# Altium PCB ESP32_Watch_Project_V2.0.PcbDoc
Units mil, origin at the board's own origin, x right, y up, seen from the top; angles counter-clockwise.
Board outline 1379.8 x 1574.8 mil, 2 copper layers (Top Layer, Bottom Layer); 52 components, 40 nets, 209 pads, 1 vias.
Unrouted connection lines stored in the file: 81.
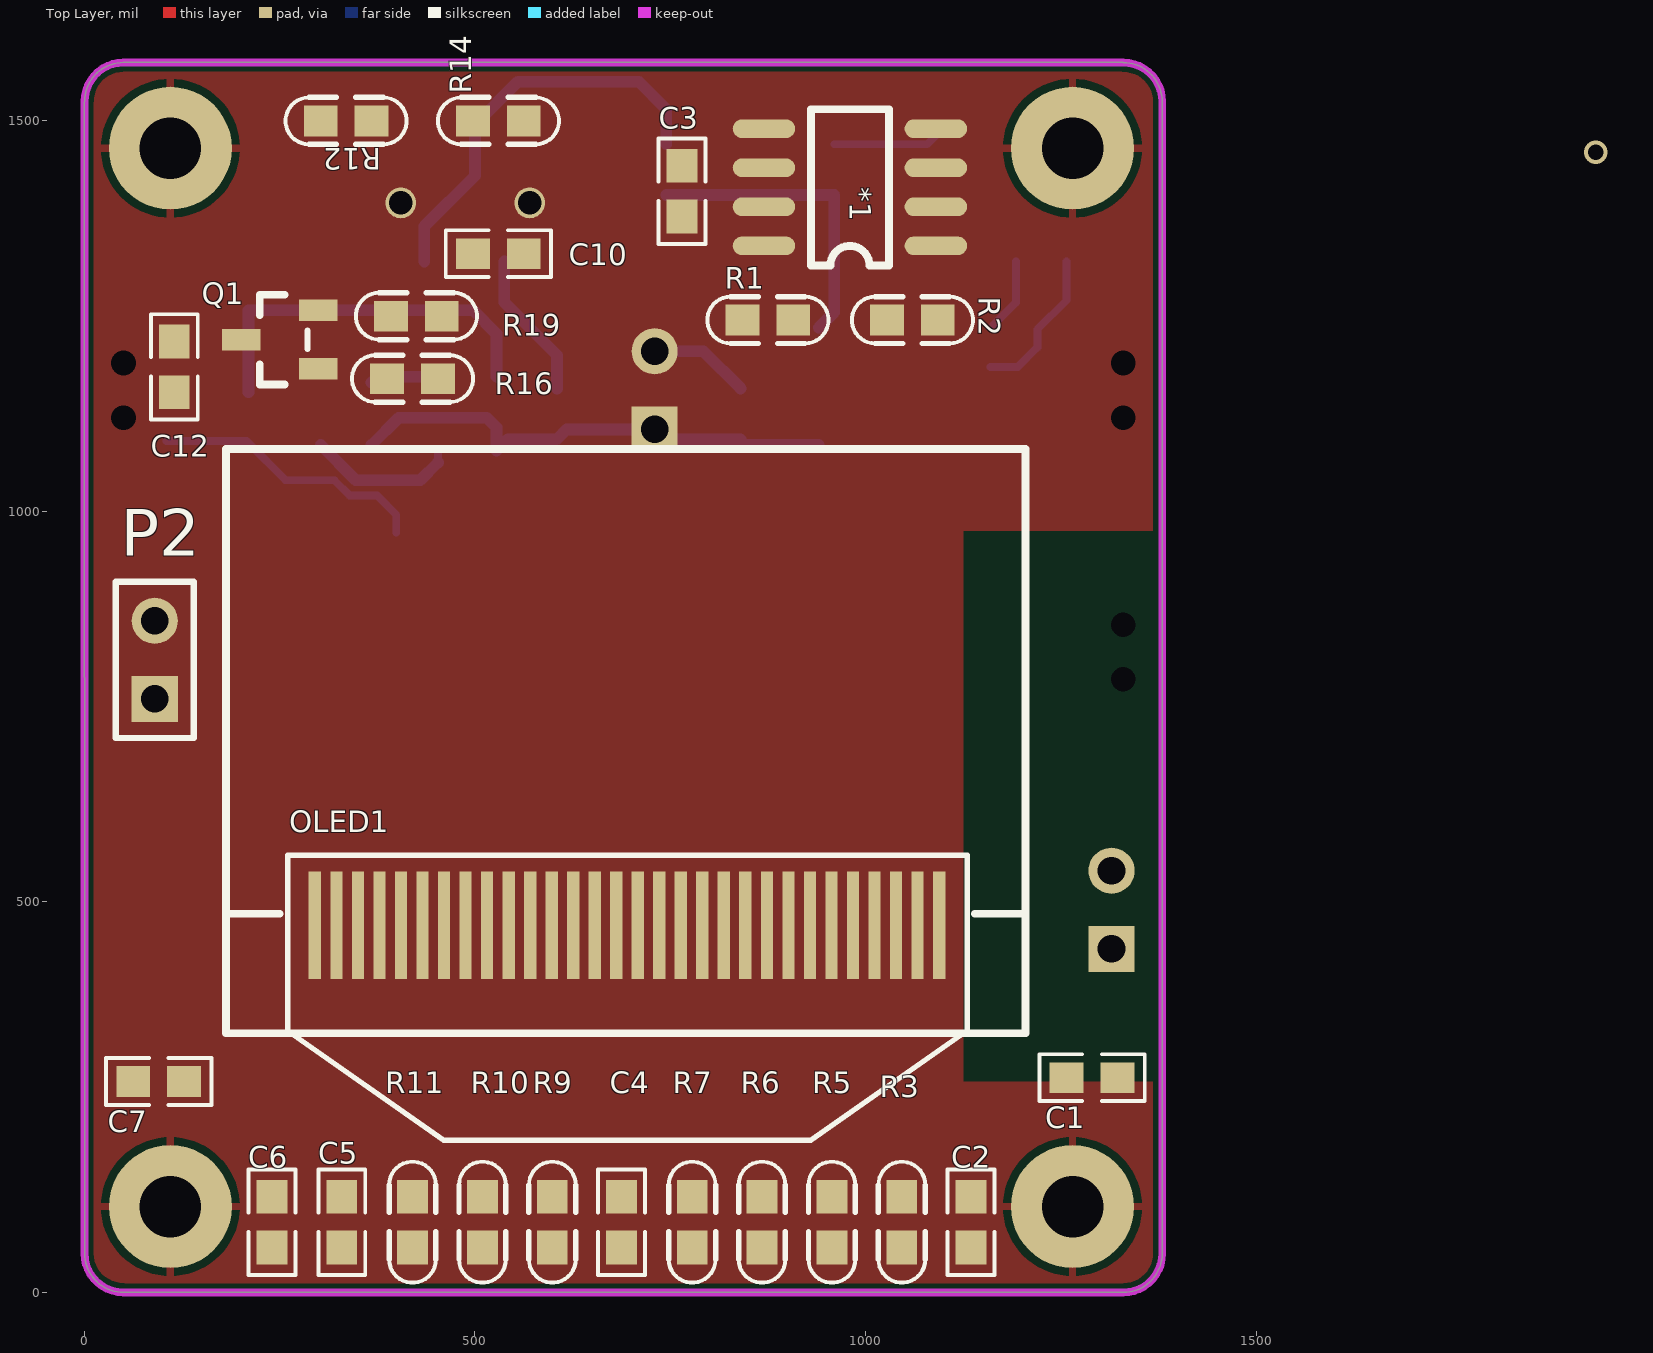
[diagram p0: Top Layer view]
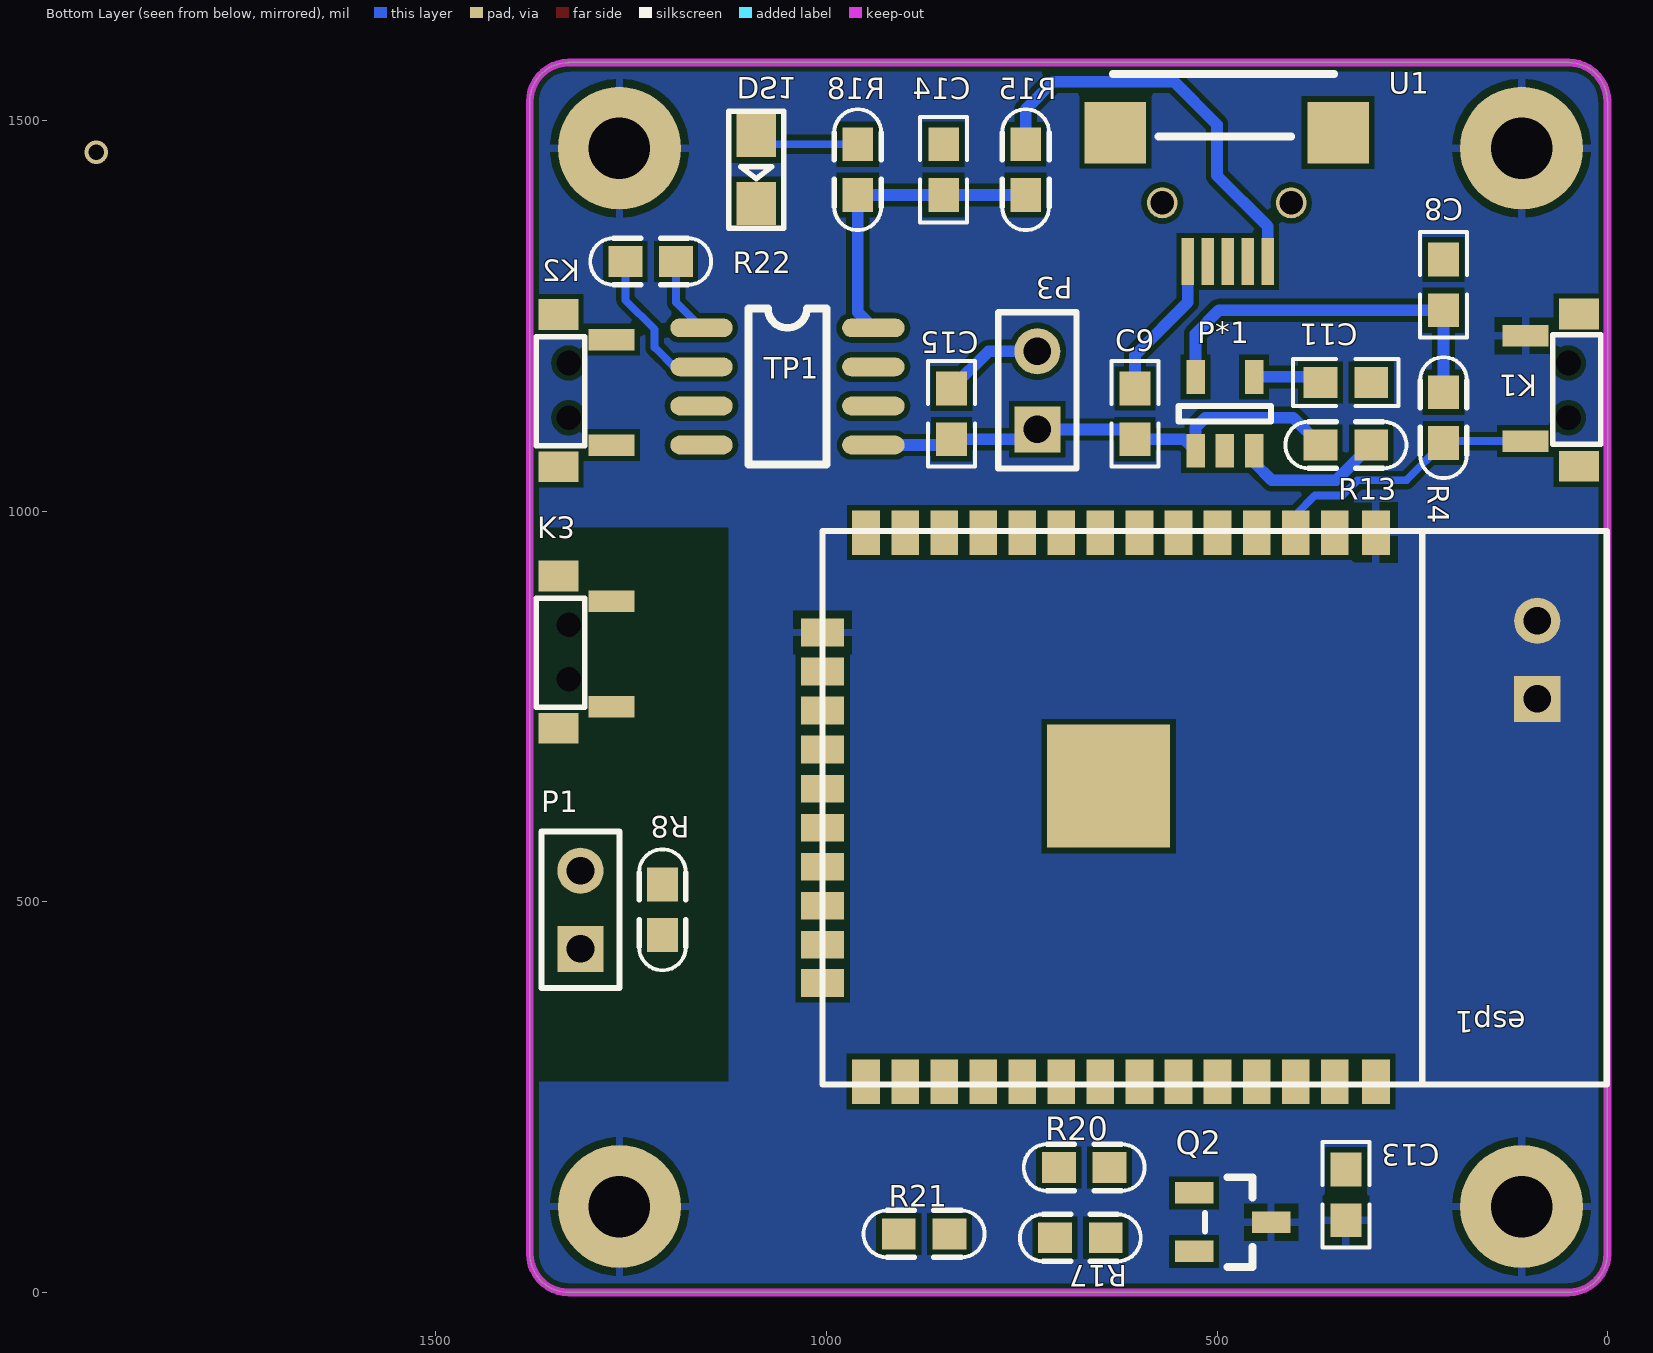
[diagram p1: Bottom Layer view, seen from below]

## Layer stack, top to bottom
Top Solder: solder mask 0.4, Solder Resist, Dk 3.5
Top Layer: signal copper 1.4
Dielectric 1: dielectric 12.6, FR-4, Dk 4.8
Bottom Layer: signal copper 1.4
Bottom Solder: solder mask 0.4, Solder Resist, Dk 3.5

## Board outline
0.2,50 ccw(c50,50) 50,0.2 50,0 1330,0 ccw(c1330,49.8) 1379.8,49.8 1379.8,1524.8 ccw(c1330,1524.8) 1330,1574.61 1330,1574.8 50,1574.8 ccw(c50,1525) 0.2,1525 0,1524.8

## Design rules (kind name [scope] priority, off if disabled: settings)
Clearance [All] p1: gap=7
PolygonConnect [All] p1: connectstyle=Relief reliefconductorwidth=10 reliefentries=4 polygonreliefangle="90 Angle" airgapwidth=10
RoutingVias [All] p1: holewidth=28 width=50 viastyle="Through Hole" minholewidth=28 minwidth=50 maxholewidth=28 maxwidth=50
ShortCircuit [All] p1: allowed=TRUE
SolderMaskExpansion [All] p1: expansion=4
Width [All] p1: maxlimit=20 minlimit=10 preferedwidth=10
29 further rules are at their usual default settings.

## Classes and differential pairs
component class ESP32_Watch_Project_V2.0: *1 C1 C2 C3 C4 C5 C6 C7 C8 C9 C10 C11 C12 C13 DS1 esp1 K1 K3 OLED1 P1 P3 P*1 Q1 Q2 R1 R2 R3 R4 R5 R6 R7 R8 R9 R10 R11 R12 R13 R14 R15 R16 R17 R18 R19 R20 R21 R22 TP1 U1

## Components (designator, comment, footprint, x,y, rotation, side; value= is the part's Value field where it differs from the comment)
*1 "DS3231" 2104 1090,1340 r270 top
C1 "2.2uF" R0603#1 1290,275 r90 top
C2 "4.7uF" R0603#1 1135,90 r0 top
C3 "104" R0603#1 765,1410 r0 top
C4 "4.7uF" R0603#1 687.5,90 r0 top
C5 "1uF" R0603#1 329.5,90 r0 top
C6 "1uF" R0603#1 240,90 r180 top
C7 "1uF" R0603#1 95,270 r270 top
C8 "2.2uF" R0603#1 210,1290 r180 bottom
C9 "1uF" R0603#1 605,1125 r180 bottom
C10 "0.1uF" R0603#1 530,1330 r270 top
C11 "10nF" R0603#1 335,1165 r270 bottom
C12 "4.7uf" R0603#1 115,1185 r180 top
C13 "4.7uf" R0603#1 335,125 r180 bottom
C14 "10uF" R0603#2 850,1437.5 r180 bottom
C15 "10uF" R0603#1 840,1125 r180 bottom
DS1 "LED" SMDLED 1090,1481.06 r270 bottom
esp1 "3.3v" esp32_cord 1005,975 r270 bottom
K1 "KEY_B" KEY_b 5,1230 r270 bottom locked
K2 "KEY_B" KEY_b 1375,1080 r90 bottom locked
K3 "KEY_B" KEY_b 1375,745 r90 bottom
OLED1 "OLED 0.96" 0.96_OLED 690,525 r0 top
P1 "Header 2" HDR1X2 1315,440 r90 bottom
P2 "Header 2" HDR1X2 90,760 r90 top
P3 "Header 2" HDR1X2 730,1105 r90 bottom
P*1 "CAT6219" CAT6219 405,1160 r90 bottom
Q1 "SI2302" SOT-23(SOT-23-3) 250,1220 r0 top
Q2 "SI2302" SOT-23(SOT-23-3) 480,90 r0 bottom
R1 "4.3K" C0603#1 875,1245 r90 top
R2 "4.3K" C0603#1 1060,1245 r270 top
R3 "910K" C0603#1 1046.5,90 r0 top
R4 "12k" C0603#1 210,1120 r0 bottom
R5 "4.7K" C0603#1 957,90 r0 top
R6 "4.7K" C0603#1 867.5,90 r0 top
R7 "4.7K" C0603#1 778,90 r0 top
R8 "12k" C0603#1 1210,490 r0 bottom
R9 "10K" C0603#1 599,90 r0 top
R10 "1K" C0603#1 509.5,90 r180 top
R11 "1K" C0603#1 420,90 r180 top
R12 "330K" C0603#1 335,1500 r270 top
R13 "10k" C0603#1 335,1085 r270 bottom
R14 "100K" C0603#1 530,1500 r270 top
R15 "0.4R" C0603#2 745,1437.5 r0 bottom
R16 "100R" C0603#1 420,1170 r270 top
R17 "100R" C0603#1 675,70 r90 bottom
R18 "1.2k" C0603#2 960,1437.5 r180 bottom
R19 "10k" C0603#1 425,1250 r270 top
R20 "10k" C0603#1 670,160 r90 bottom
R21 "12k" C0603#1 875,75 r270 bottom
R22 "1.2k" C0603#1 1225,1320 r90 bottom
TP1 "TP4056" 2104 1160,1235 r90 bottom
U1 "U?" type_a 630,1355 r180 bottom

## Footprints (in the part's own frame and the unit in brackets; to place one, negate y for a bottom-side part, rotate by r counter-clockwise, add the part's x,y. Pads: shape width x height; smd on the part's side, far side on the other; paste and mask are expansions set on the pad)
0.96_OLED [mm]
  rect 0.4x3.5 smd: 1(-10.033,-1.397) 2(-9.333,-1.397) 3(-8.633,-1.397) 4(-7.933,-1.397) 5(-7.233,-1.397) 6(-6.533,-1.397) 7(-5.833,-1.397) 8(-5.133,-1.397) 9(-4.433,-1.397) 10(-3.733,-1.397) 11(-3.033,-1.397) 12(-2.333,-1.397) 13(-1.633,-1.397) 14(-0.933,-1.397) 15(-0.233,-1.397) 16(0.467,-1.397) 17(1.167,-1.397) 18(1.867,-1.397) 19(2.567,-1.397) 20(3.267,-1.397) 21(3.967,-1.397) 22(4.667,-1.397) 23(5.367,-1.397) 24(6.067,-1.397) 25(6.767,-1.397) 26(7.467,-1.397) 27(8.167,-1.397) 28(8.867,-1.397) 29(9.567,-1.397) 30(10.267,-1.397)
  silkscreen extent -10.92,-8.38 11.18,0.89
2104 [mil]
  oval 24x80 smd: 1(0,0) 2(-50,0) 3(-100,0) 4(-150,0) 5(-150,-220) 6(-100,-220) 7(-50,-220) 8(0,-220)
  silkscreen extent -175,-160 25,-60
C0603#1 [mm]
  rect 1x1.1 smd: 1(0,0.826) 2(0,-0.826)
  silkscreen extent -0.76,-1.97 0.76,1.97
C0603#2 [mm]
  rect 1x1.1 smd: 1(0,-0.826) 2(0,0.826)
  silkscreen extent -0.76,-1.97 0.76,1.97
CAT6219 [mm]
  rect 1.1x0.6 smd: 1(-2.089,3.109) 2(-2.089,2.159) 3(-2.089,1.209) 4(0.311,1.209) 5(0.311,3.109)
  silkscreen extent -1.14,0.66 -0.64,3.66
esp32_cord [mil]
  rect 57x35.43 smd: 1(2,708.66) 2(2,655.72) 3(2,605.72) 4(2,555.72) 5(2,505.72) 6(2,455.72) 7(2,405.72) 8(2,355.72) 9(2,305.72) 10(2,255.72) 11(2,205.72) 12(2,155.72) 13(2,105.72) 14(2,55.72) 25(705,55.72) 26(705,105.72) 27(705,155.72) 28(705,205.72) 29(705,255.72) 30(705,305.72) 31(705,355.72) 32(705,405.72) 33(705,455.72) 34(705,505.72) 35(705,555.72) 36(705,605.72) 37(705,655.72) 38(705,708.66)
  rect 35.43x55 smd: 15(129.92,0) 16(179.92,0) 17(229.92,0) 18(279.92,0) 19(329.92,0) 20(379.92,0) 21(429.92,0) 22(479.92,0) 23(529.92,0) 24(578.74,0)
  rect 157.48x157.48 smd: 39(326.77,366.14)
  silkscreen extent 0,0 709,1004
HDR1X2 [mm] "Connector; Header; 2 Position"
  rect 1.5x1.5 hole 0.9: 1(0,0)
  round 1.5 hole 0.9: 2(2.54,0)
  silkscreen extent -1.27,-1.27 3.81,1.27
KEY_b [mm]
  rect 0.7x1.5 smd: 1(0.127,-2.54) 2(3.556,-2.54)
  round 0 hole 0.8: 3(1.016,-1.143) 4(2.794,-1.143)
  rect 1x1.3 smd: 5(-0.578,-0.806) 6(4.375,-0.806)
  silkscreen extent 0.1,-1.66 3.65,-0.09
R0603#1 [mm]
  rect 1x1.1 smd: 1(0,0.826) 2(0,-0.826)
  silkscreen extent -0.76,-1.71 0.76,1.71
R0603#2 [mm]
  rect 1x1.1 smd: 1(0,-0.826) 2(0,0.826)
  silkscreen extent -0.76,-1.71 0.76,1.71
SMDLED [mm]
  rect 1.4x1.27 smd: 1(0.001,0.002) 2(2.211,0.002)
  silkscreen extent -0.8,-0.89 3.01,0.89
SOT-23(SOT-23-3) [mm]
  rect 1.25x0.7 smd: 1(1.25,-0.95) 2(1.25,0.95) 3(-1.25,0)
  silkscreen extent -0.65,-1.46 0.9,1.46, body extent -1.25,-1.5 1.15,1.5, height 1.05
type_a [mil]
  rect 15.75x60 smd: 1(92.68,-35) 2(118.27,-35) 3(143.86,-35) 4(169.45,-35) 5(195.04,-35)
  round 39.37 hole 30: 9(60,40) 10(225,40)
  rect 78.74x78.74 smd: 13(0,129.92) 14(285,130)
  silkscreen extent -3,125 280,205

## Part data
C1 C2 C4 C5 C6 C7 C12 C13 C14 C15: library part CAP, "Capacitor"
C3 C8 C9 C10 C11: library part Cap_1, "Capacitor"
DS1: library part LED2, "Typical RED, GREEN, YELLOW, AMBER GaAs LED"
esp1: library part esp32_core
OLED1: library part OLED
P1 P2 P3: "Header, 2-Pin"
Q1 Q2: "N-Channel Power MOSFET"
R1 R2 R3 R4 R5 R6 R7 R8 R9 R10 R11 R12 R13 R14 R15 R16 R17 R18 R19 R20 R21 R22: library part Res
U1: library part type_a

## Free pads (board coordinates)
  round 157.48 hole 78.74: 0(110,110) 0(110,1465) 0(1265,110) 0(1265,1465)

## Via types
v1: diameter 30, hole 20, Top Layer to Bottom Layer, 1 vias

## Nets (pads, with @x,y where several pads share a name; then routed paths per layer and width w, separated by ;. In a path a pad name is that pad's centre, name@x,y a point inside that pad or via, vN(x,y) a via of type N, cw(c..) or ccw(c..) an arc to the next point about the centre after c; other vN are vias at no path point)
3.3V: *1.2 C5.1 C8.2 C13.1 esp1.2 OLED1.6 OLED1.9 P*1.5 R1.1 R2.1 R4.2 R5.2 R6.2 R8.2 R9.2 R10.1 | length 490.1
  Bottom Layer w15: R4.2 C8.2 497.5,1257.5 527.4,1227.6 P*1.5
AI_VBAT: C10.2 esp1.8 R12.1 R14.2
BAT: *1.6 C3.2 C9.2 C12.1 C15.2 P3.1 P*1.1 R12.2 R13.2 TP1.5 | length 641.5
  Bottom Layer w10: C15.2 C15.2@847.5,1085
  Bottom Layer w15: R13.2 402.5,1120 515,1120 527.4,1107.6 P*1.1 542.15,1092.5 C9.2 617.5,1105 P3.1 742.5,1092.5 C15.2 ; C15.2@847.5,1085 TP1.5
DS2: DS1.1 esp1.27 esp1.28 R17.1 R18.2 TP1.7 | length 134.5
  Bottom Layer w10: R18.2 1078.91,1470 DS1.1
DSCL: *1.8 esp1.33 R1.2
DSDA: *1.7 esp1.36 R2.2
EN: esp1.3 K1.2 R4.1 | length 356.1
  Bottom Layer w10: K1.2 207.5,1090 R4.1 257.5,1040 319.92,1040 339.42,1020.5 374.5,1020.5 399.28,995.72 esp1.3
GND: *1.5 C3.1 C8.1 C9.1 C10.1 C11.1 C14.2 C15.1 P1.2 P3.2 P*1.2 Q2.2 R14.1 R20.1 R22.2 TP1.1 TP1.3 U1.1 U1.13 U1.14 | length 418.7
  Bottom Layer w10: TP1.1 1192.5,1267.5 R22.2
  Bottom Layer w15: U1.1 537.32,1267.68 605,1200 C9.1 ; P3.2 792.5,1205 C15.1
KEY0: esp1.12 K3.1
KEY1: esp1.13 K2.2
NetC1_1: C1.1 OLED1.28
NetC2_1: C2.1 OLED1.27
NetC4_1: C4.1 OLED1.14 R9.1
NetC6_1: C6.1 OLED1.5
NetC6_2: C6.2 OLED1.4
NetC7_1: C7.1 OLED1.3
NetC7_2: C7.2 OLED1.2
NetC11_2: C11.2 P*1.4 | length 88.1
  Bottom Layer w15: C11.2 374.74,1172.24 P*1.4
NetC12_2: C12.2 P1.1 Q1.3
NetC14_1: C14.1 R15.2 R18.1 TP1.4 TP1.8 | length 393.3
  Bottom Layer w15: R15.2 C14.1 R18.1 960,1255 TP1.8
NetDS1_2: DS1.2 TP1.6
Netesp1_25: esp1.25 R8.1
NetK3_2: K3.2 R21.2
NetOLED1_10: OLED1.10 R11.2
NetOLED1_11: OLED1.11 R10.2
NetOLED1_15: OLED1.15 R7.1
NetOLED1_21: OLED1.21 OLED1.22 OLED1.23 OLED1.24 OLED1.25
NetOLED1_26: OLED1.26 R3.1
NetP*1_3: P*1.3 R13.1 | length 193.3
  Bottom Layer w10: P*1.3@452.6,1062.6 P*1.3
  Bottom Layer w15: R13.1 347.5,1040 430,1040 P*1.3@452.6,1062.6
NetQ1_1: Q1.1 R16.2 R19.2
NetQ2_1: Q2.1 R17.2 R20.2
NetR22_1: R22.1 TP1.2 | length 195.9
  Bottom Layer w10: TP1.2 1195,1185 1220,1210 1220,1233.06 1257.5,1270.56 R22.1
OSCL: esp1.10 OLED1.18 R6.1
OSDA: esp1.11 OLED1.19 OLED1.20 R5.1
PWM: esp1.26 R16.1
RXD0: esp1.34 U1.4
TXD0: esp1.35 U1.3
V_3.3V: R21.1
V_GND: C1.2 C2.2 C4.2 C5.2 C13.2 esp1.1 esp1.15 K1.1 OLED1.1 OLED1.8 OLED1.12 OLED1.13 OLED1.16 OLED1.17 OLED1.29 OLED1.30 pad.0 Q1.2 Q2.3 R3.2 R7.2 R11.1 R19.1
  other v1: 1935,1460
VCC: R15.1 U1.5 | length 529.2
  Bottom Layer w15: U1.5 434.96,1364.96 500,1430 500,1495 555,1550 710,1550 745,1515 R15.1
pads on no net: *1.1 *1.3 *1.4 esp1.4 esp1.5 esp1.6 esp1.7 esp1.9 esp1.14 esp1.16 esp1.17 esp1.18 esp1.19 esp1.20 esp1.21 esp1.22 esp1.23 esp1.24 esp1.29 esp1.30 esp1.31 esp1.32 esp1.37 esp1.38 esp1.39 K1.3 K1.4 K1.5 K1.6 K2.1 K2.3 K2.4 K2.5 K2.6 K3.3 K3.4 K3.5 K3.6 OLED1.7 P2.1 P2.2 U1.2 U1.9 U1.10

## Polygon pours and split planes (outlines as drawn)
V_GND on Bottom Layer "Layer2-GND" (solid, remove dead copper, pour order 16): 1379.8,980 1125,980 1125,270 1379.8,270 1379.8,-144.8 1380,-145 1340,-105 -160,-105 -160,1685 -85,1760 -60,1735 1635,1735 1635,1240.2 1379.8,985
V_GND on Top Layer "Layer2-GND" (solid, remove dead copper, pour order 18): 1379.8,975 1125,975 1125,270 1379.8,270 1379.8,-50.2 1375,-55 1365,-45 -180,-45 -180,1680 -25,1835 70,1740 1555,1740 1555,1155.2 1379.8,980

## Keep-outs
Keep-Out Layer:
  lines w10: 0,1524.8 0,50 ccw(c49.8,50) 49.8,0.2 ; 0.2,1525 cw(c50,1525) 50,1574.8 1330,1574.8 ; 50,0 1330,0 ccw(c1330,49.8) 1379.8,49.8 1379.8,1524.8 ccw(c1330,1524.8) 1330,1574.61

## Silkscreen, mask and mechanical layers (free items; w line width, h text height)
Top Overlay:
  lines w10: 185,485 250,485 ; 1140,485 1200,485 ; 181.38,331.97 181.38,1080 1205,1080 1205,331.97 181.38,331.97